# EAGLE board layer2 (EAGLE 9.6.2)
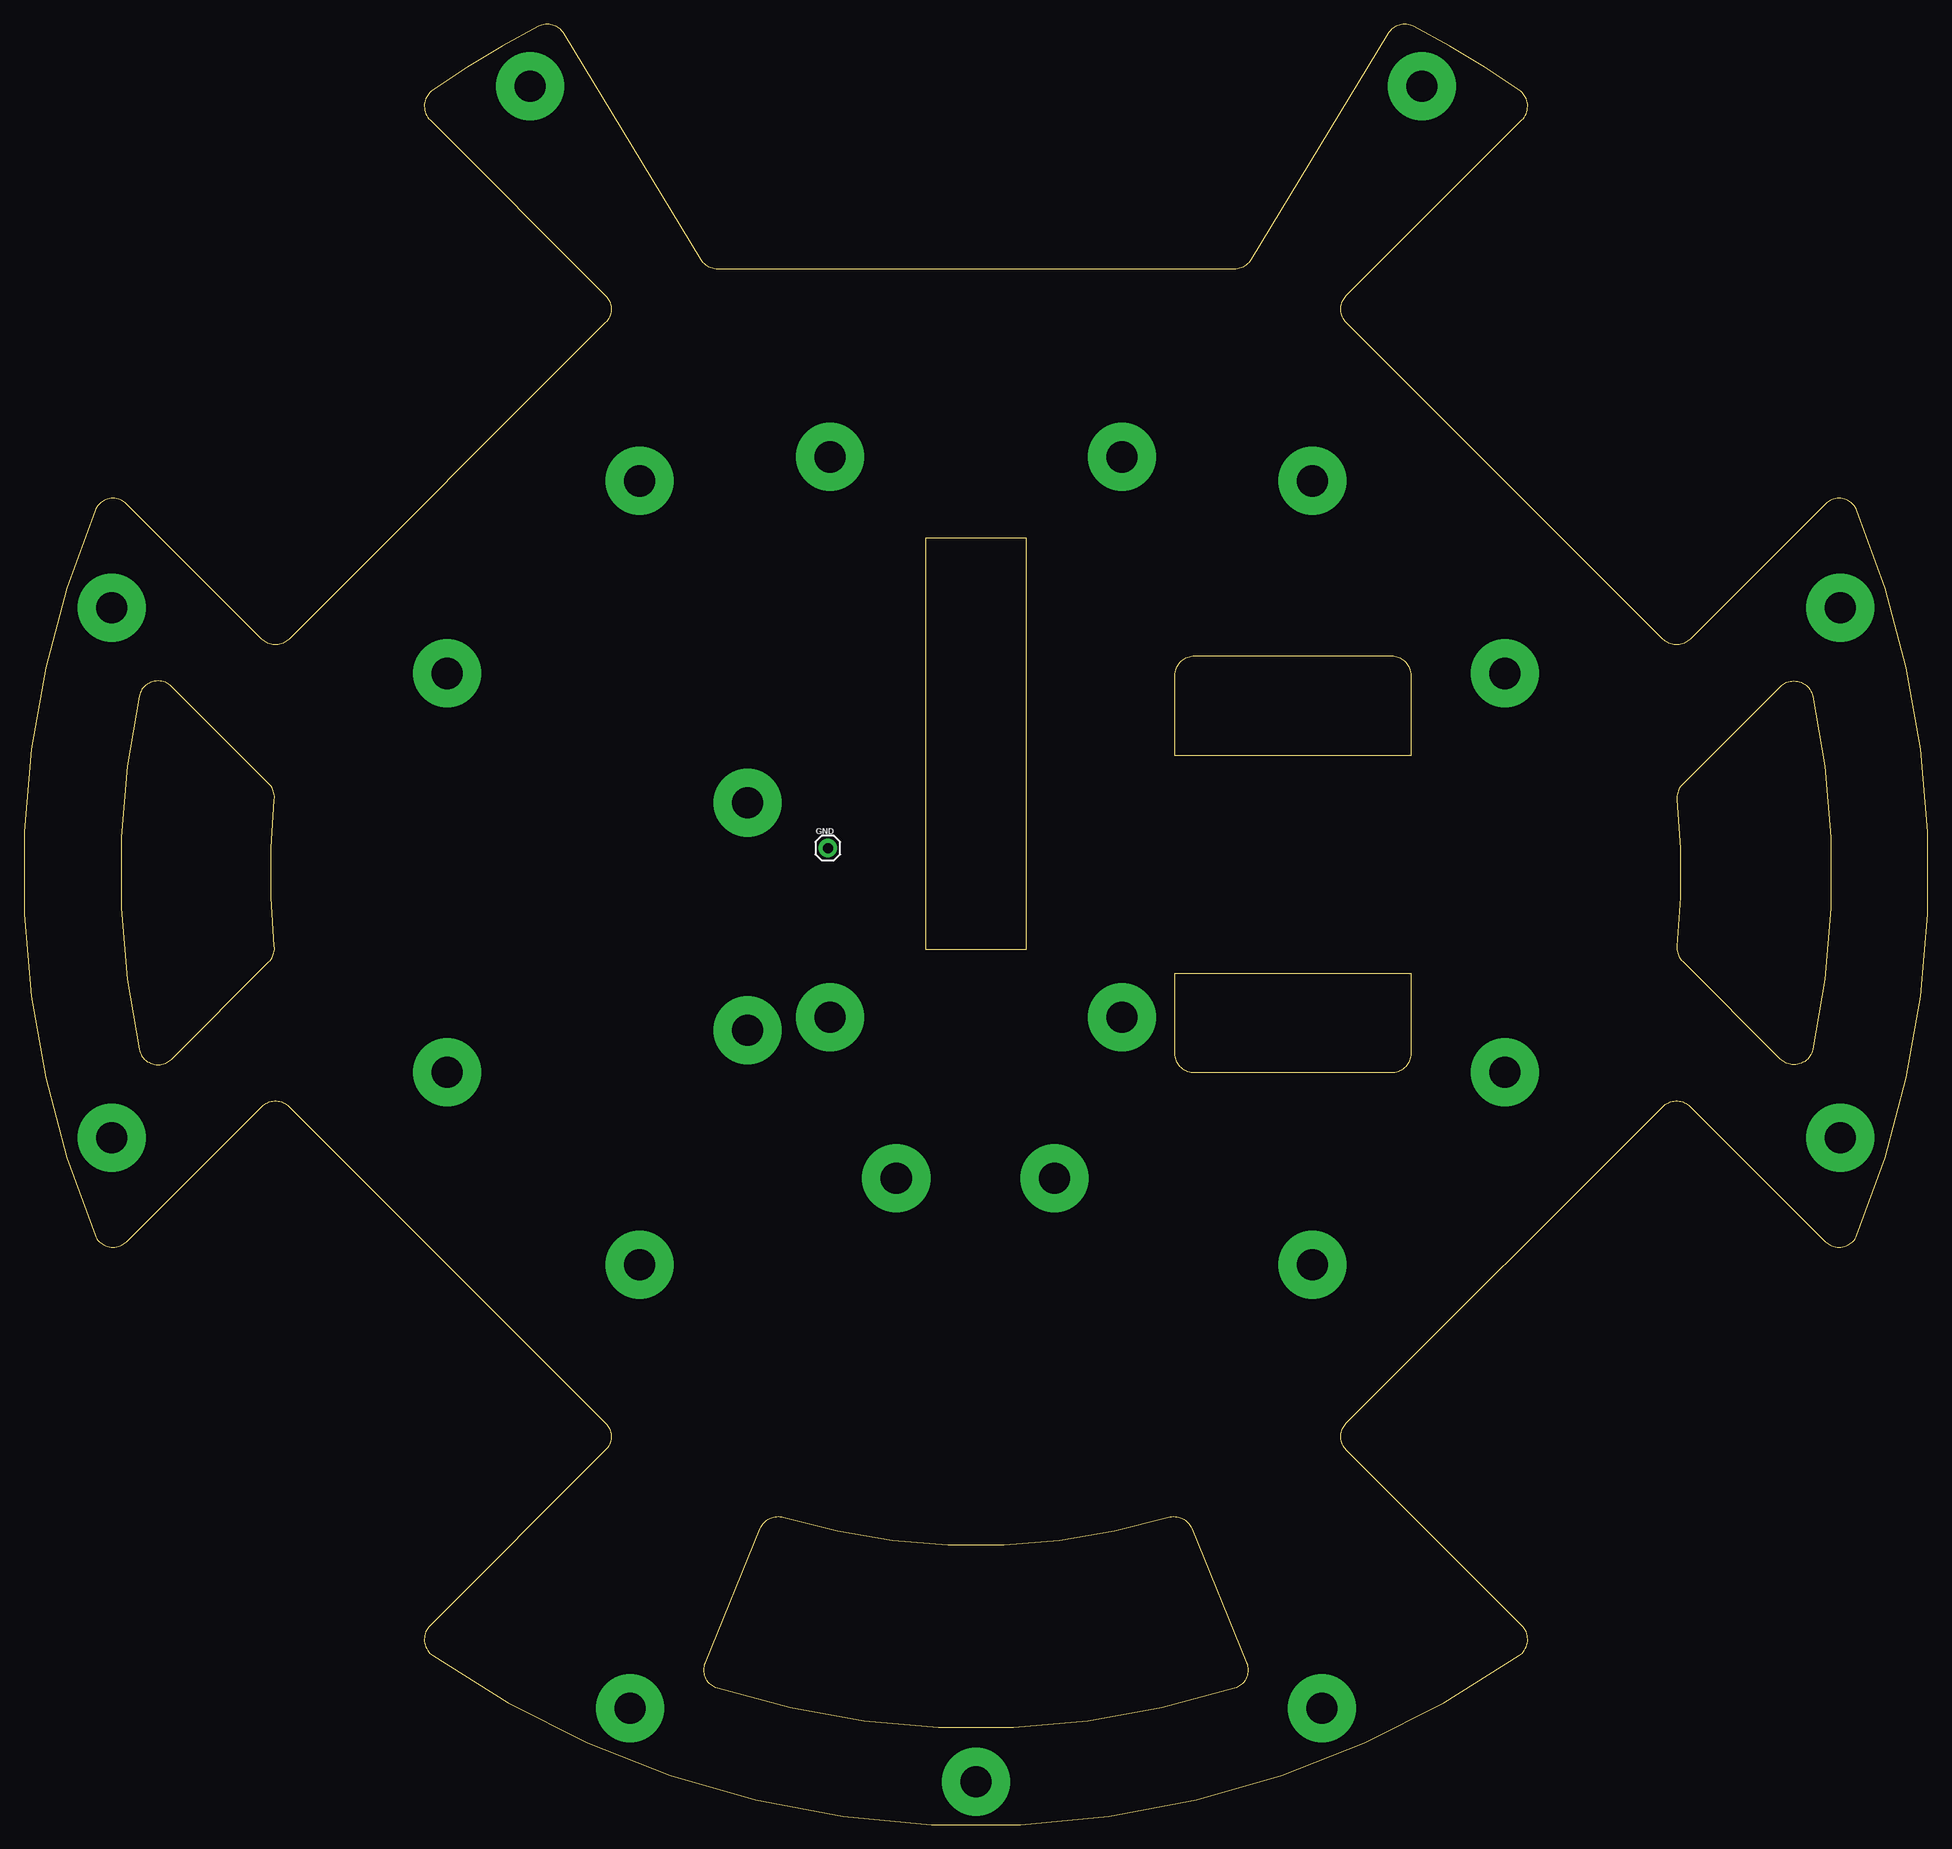
[diagram p0: board, top side]

Size 195.82 x 185.17 mm. Coordinates in mm from the lower left corner, seen from the top.
Outline: 10.54,59.97 24.42,73.85 arc-90 27.25,73.85 59.78,41.33 arc-90 59.78,38.5 41.74,20.46 arc100 42.01,17.4 arc70 153.81,17.4 arc100 154.08,20.46 136.04,38.5 arc-90 136.04,41.33 168.57,73.85 arc-90 171.4,73.85 185.28,59.97 arc113 188.54,60.62 arc45 188.54,135.17 arc113 185.28,135.82 171.4,121.93 arc-90 168.57,121.93 136.04,154.46 arc-90 136.04,157.29 154.08,175.33 arc100 153.81,178.39 arc7 142.92,184.94 arc86 140.3,184.2 126.19,160.95 arc-59 124.48,159.99 71.34,159.99 arc-59 69.63,160.95 55.52,184.2 arc86 52.89,184.94 arc7 42.01,178.39 arc100 41.74,175.33 59.78,157.29 arc-90 59.78,154.46 27.25,121.93 arc-90 24.42,121.93 10.54,135.82 arc113 7.27,135.17 arc45 7.27,60.62 arc113 10.54,59.97
Outline: 103.11,90.04 103.11,132.33 92.71,132.33 92.71,90.04 103.11,90.04
Outline: 118.39,79.31 118.39,87.59 142.64,87.59 142.64,79.31 arc-90 140.64,77.31 120.39,77.31 arc-90 118.39,79.31
Outline: 118.39,109.94 118.39,118.21 arc-90 120.39,120.21 140.64,120.21 arc-90 142.64,118.21 142.64,109.94 118.39,109.94
Outline: 78.13,31.61 arc33 117.68,31.61 arc-84 120.1,30.46 125.75,16.67 arc-95 124.5,14.01 arc-35 71.32,14.01 arc-95 70.07,16.67 75.71,30.46 arc-84 78.13,31.61
Outline: 25.16,88.73 arc51 25.73,90.35 arc-12 25.73,105.44 arc51 25.16,107.06 15.17,117.04 arc123 11.8,116.04 arc24 11.8,79.75 arc123 15.17,78.75 25.16,88.73
Outline: 170.66,88.73 arc-51 170.09,90.35 arc12 170.09,105.44 arc-51 170.66,107.06 180.65,117.04 arc-123 184.02,116.04 arc-24 184.02,79.75 arc-123 180.65,78.75 170.66,88.73
Copper layers (1*16): Top 0.035mm / dielectric 1.5mm / Bottom 0.035mm
Design rules "default": minimum track width 6mil, minimum drill 0.35mm, track to track 6mil, track to pad 6mil, pad to pad 6mil, via to via 6mil, smd to smd 6mil, copper to edge 40mil, drill to drill 6mil, minimum pad ring 10mil, minimum via ring 8mil, stop-mask expansion 4mil, vias tented up to drill 0mil, thermal gap 10mil

## Footprints (pad centres in the part's own frame; a part is rotated, then mirrored left to right if it is on the bottom)
1X01 = drill 1.016 pad 1.88: 1 0,0

## Placement (x,y rotation side)
GND  [1X01]  82.67,100.43 0 top

## Library data of the parts
GND = SparkFun-Connectors

## Nets
GND: GND.1

## Tracks (layer width: path | path; a pad name or v marks a point on that pad's centre or on a via)
N$1  (via drill 3.2 pad 7)
  other vias: 143.77,178.8
N$2  (via drill 3.2 pad 7)
  other vias: 82.91,140.67
N$3  (via drill 3.2 pad 7)
  other vias: 112.91,140.67
N$4  (via drill 3.2 pad 7)
  other vias: 132.5,138.2
N$5  (via drill 3.2 pad 7)
  other vias: 63.31,138.2
N$6  (via drill 3.2 pad 7)
  other vias: 52.05,178.8
N$7  (via drill 3.2 pad 7)
  other vias: 43.51,118.4
N$8  (via drill 3.2 pad 7)
  other vias: 74.41,105.09
N$9  (via drill 3.2 pad 7)
  other vias: 152.3,118.4
N$10  (via drill 3.2 pad 7)
  other vias: 186.83,125.14
N$11  (via drill 3.2 pad 7)
  other vias: 186.83,70.65
N$12  (via drill 3.2 pad 7)
  other vias: 152.3,77.39
N$13  (via drill 3.2 pad 7)
  other vias: 132.5,57.59
N$14  (via drill 3.2 pad 7)
  other vias: 112.91,83.04
N$15  (via drill 3.2 pad 7)
  other vias: 105.98,66.47
N$16  (via drill 3.2 pad 7)
  other vias: 89.71,66.47
N$17  (via drill 3.2 pad 7)
  other vias: 82.91,83.04
N$18  (via drill 3.2 pad 7)
  other vias: 74.41,81.69
N$19  (via drill 3.2 pad 7)
  other vias: 43.51,77.39
N$20  (via drill 3.2 pad 7)
  other vias: 63.31,57.59
N$21  (via drill 3.2 pad 7)
  other vias: 8.99,125.14
N$22  (via drill 3.2 pad 7)
  other vias: 8.99,70.65
N$23  (via drill 3.2 pad 7)
  other vias: 62.32,11.97
N$24  (via drill 3.2 pad 7)
  other vias: 97.91,4.39
N$25  (via drill 3.2 pad 7)
  other vias: 133.5,11.97